# Altium PCB m14sim.PcbDoc
Units mil, origin at the board's own origin, x right, y up, seen from the top; angles counter-clockwise.
Board outline 2000 x 2600 mil, 2 copper layers (Top Layer, Bottom Layer); 13 components, 51 nets, 113 pads, 26 vias.
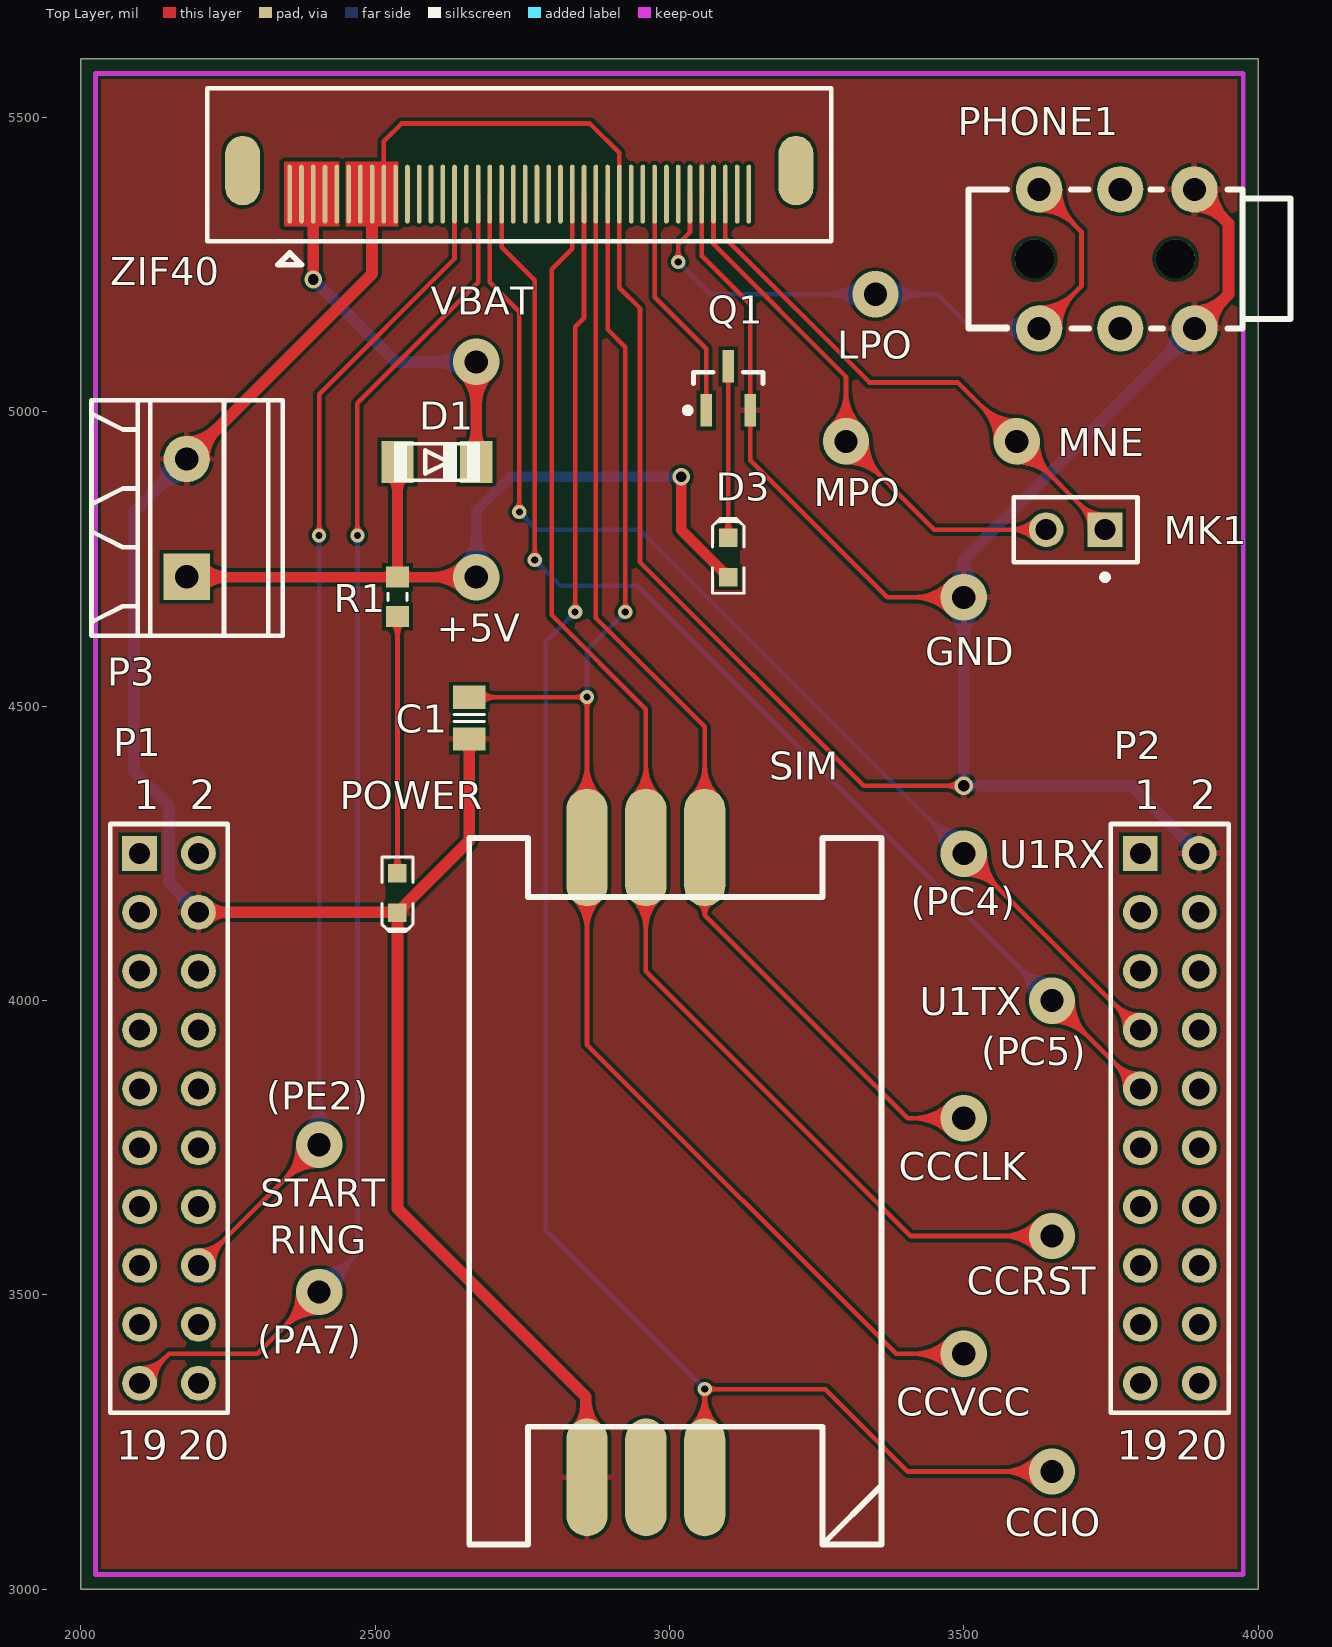
[diagram p0: Top Layer view]
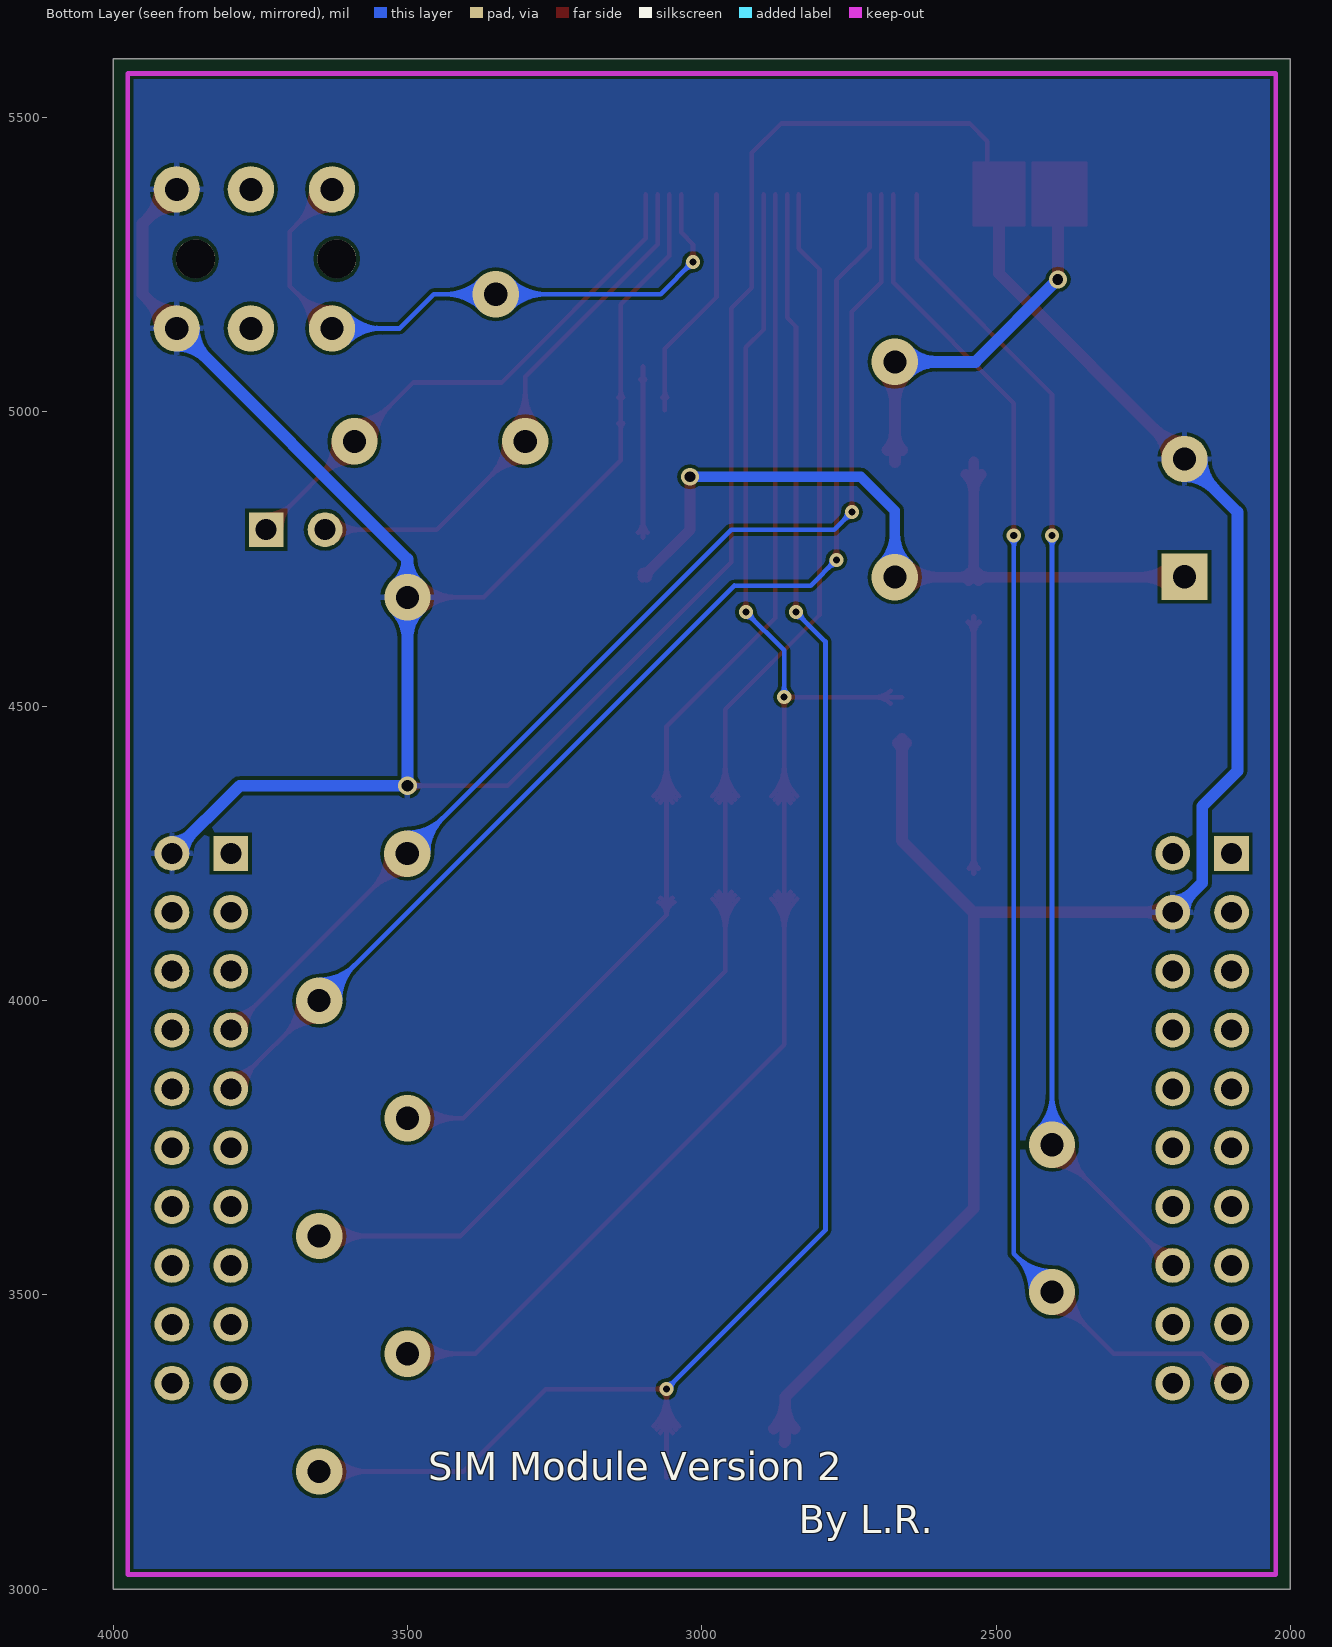
[diagram p1: Bottom Layer view, seen from below]

## Layer stack, top to bottom
Top Layer: signal copper 1.4
Dielectric: dielectric 12.6, FR-4, Dk 4.8
Bottom Layer: signal copper 1.4

## Board outline
2000,3000 4000,3000 4000,5600 2000,5600

## Design rules (kind name [scope] priority, off if disabled: settings)
Clearance [All] p1: gap=6
PolygonConnect [All] p1: connectstyle=Relief reliefconductorwidth=10 reliefentries=4 polygonreliefangle="90 Angle"
RoutingVias VSS [InNet('CCGND')] p1: holewidth=20 width=32 viastyle="Through Hole" minholewidth=20 minwidth=32 maxholewidth=40 maxwidth=80
RoutingVias 5V [(InNet('VBAT') OR InNet('V5'))] p2: holewidth=18 width=30 viastyle="Through Hole" minholewidth=18 minwidth=30 maxholewidth=40 maxwidth=80
RoutingVias [All] p3: holewidth=12 width=24 viastyle="Through Hole" minholewidth=12 minwidth=24 maxholewidth=40 maxwidth=80
SilkscreenOverComponentPads [All] p1: minsilkscreentomaskgap=10
SolderMaskExpansion [All] p1: expansion=4
Width GND [InNet('CCGND')] p1: maxlimit=22 minlimit=7.87 preferedwidth=20
Width VCC [(InNet('VBAT') OR InNet('V5'))] p2: maxlimit=20 minlimit=7.87 preferedwidth=18
Width [All] p3: maxlimit=9 minlimit=7.87 preferedwidth=8
27 further rules are at their usual default settings.

## Components (designator, comment, footprint, x,y, rotation, side; value= is the part's Value field where it differs from the comment)
C1 "Cap Semi" CAP_0805 2660,4480 r90 top
D1 "DIAO" DIAO 2610,4925 r180 top
D3 "LED3" LED_0603_RED 3100,4753 r90 top
MK1 "Mic2" PIN2 3740,4800 r180 top
P1 "Header 10X2" HDR2X10 2100,4250 r270 top
P2 "Header 10X2" HDR2X10 3800,4250 r270 top
P3 "Header 2" MKDSN_2RMI 2180,4720 r90 top
PHONE1 "PHONE_M" PHONE_ST 3760,5260 r0 top
POWER "POWER" LED_0603_RED 2538.07,4183 r270 top
Q1 "S8050" SOT23 3100,5040 r90 top
R1 "Res Semi" RES_0603 2538.07,4686 r90 top
SIM "SIMCARD" SIM6 3060,4260 r270 top
ZIF40 "TC35I" ZIF 2620,4880 r180 top (schematic designator *?)

## Footprints (in the part's own frame and the unit in brackets; to place one, negate y for a bottom-side part, rotate by r counter-clockwise, add the part's x,y. Pads: shape width x height; smd on the part's side, far side on the other; paste and mask are expansions set on the pad)
CAP_0805 [mm] "Chip Capacitor, Body 2.0x1.2mm, 0805, IPC Medium Density"
  rect 1x1.4 smd: 1(-0.9,0) 2(0.9,0)
  Top Layer pour cut-out: -0.4,0.8 0.4,0.8 0.4,-0.8 -0.4,-0.8
  silkscreen extent -0.15,-0.65 0.15,0.65, body extent -1.1,-0.72 1.1,0.73, height 1.34
DIAO [mm]
  rect 1.4x1.8 smd: 1(1.827,0.254) 2(-1.573,0.254)
  silkscreen extent -1.73,-0.61 1.98,1.12
HDR2X10 [mm] "Connector; Header; 10x2 Position"
  rect 1.5x1.5 hole 0.9: 1(0,0)
  round 1.5 hole 0.9: 2(0,2.54) 3(2.54,0) 4(2.54,2.54) 5(5.08,0) 6(5.08,2.54) 7(7.62,0) 8(7.62,2.54) 9(10.16,0) 10(10.16,2.54) 11(12.7,0) 12(12.7,2.54) 13(15.24,0) 14(15.24,2.54) 15(17.78,0) 16(17.78,2.54) 17(20.32,0) 18(20.32,2.54) 19(22.86,0) 20(22.86,2.54)
  silkscreen extent -1.27,-1.27 24.13,3.81
LED_0603_RED [mm]
  rect 0.8x0.8 smd: 1(-0.85,0) 2(0.85,0)
  Top Layer pour cut-out: -0.5,0.5 0.5,0.5 0.5,-0.5 -0.5,-0.5
  silkscreen extent -1.55,-0.68 1.68,0.67, body extent -0.8,-0.4 0.8,0.4, height 0.75
MKDSN_2RMI [mm]
  rect 2x2 hole 1: 1(0,0)
  round 2 hole 1: 2(5.08,0)
  silkscreen extent -2.54,-4.15 7.62,4.11
PHONE_ST [mm]
  round 1.676 hole 1.676: 0(-3.556,0) 0(2.54,0)
  round 2 hole 1: 1(-3.35,-3) 1(-3.35,3) 2(0.15,-3) 2(0.15,3) 3(3.35,-3) 3(3.35,3)
  silkscreen extent -6.39,-3.01 7.49,3
PIN2 [mm] "Photosensitive Diode; 2 Leads"
  rect 1.5x1.5 hole 0.9: 1(0,0)
  round 1.5 hole 0.9: 2(2.54,0)
  silkscreen extent -1.4,-1.4 3.94,2.17
RES_0603 [mm]
  rect 0.9x1 smd: 1(-0.85,0) 2(0.85,0)
  Top Layer pour cut-out: -0.4,0.6 0.4,0.6 0.4,-0.6 -0.4,-0.6
  silkscreen extent -0.15,-0.41 0.15,0.41, body extent -0.87,-0.47 0.88,0.48, height 0.54
SIM6 [mil]
  oval 200x70 smd: 1(0,-200) 2(0,-100) 3(0,0) 4(1070,-200) 5(1070,-100) 6(1070,0)
  silkscreen extent -16,-400 1184,300
SOT23 [mm] "SOT23, 3-Leads, Body 3.0x2.5mm (max), Pitch 0.95mm, IPC Medium Density"
  rect 1.4x0.5 smd: 1(-0.95,0.95) 2(-0.95,-0.95) 3(0.95,0)
  silkscreen extent -1.07,-1.5 0.7,1.87, body extent -1.4,-1.45 1.4,1.45, height 1.29
ZIF [mil]
  oval 7.87x100 smd: 1(265,-490) 2(245,-490) 3(225,-490) 4(205,-490) 5(185,-490) 6(165,-490) 7(145,-490) 8(125,-490) 9(105,-490) 10(85,-490) 11(65,-490) 12(45,-490) 13(25,-490) 14(5,-490) 15(-15,-490) 16(-35,-490) 17(-55,-490) 18(-75,-490) 19(-95,-490) 20(-115,-490) 21(-135,-490) 22(-155,-490) 23(-175,-490) 24(-195,-490) 25(-215,-490) 26(-235,-490) 27(-255,-490) 28(-275,-490) 29(-295,-490) 30(-315,-490) 31(-335,-490) 32(-355,-490) 33(-375,-490) 34(-395,-490) 35(-415,-490) 36(-435,-490) 37(-455,-490) 38(-475,-490) 39(-495,-490) 40(-515,-490)
  oval 59.05x118.11 smd: ""(-595,-530) ""(345,-530)
  silkscreen extent -655,-670 405,-370

## Part data
C1: "Capacitor (Semiconductor SIM Model)"
D3 POWER: library part LED1, "Typical RED GaAs LED"
MK1: "Microphone"
P1 P2: "Header, 10-Pin, Dual row"
P3: "Header, 2-Pin"
Q1: library part BC848W, "NPN General-purpose Transistor"
R1: "Semiconductor Resistor"

## Via types
v1: diameter 78.74, hole 39.37, Top Layer to Bottom Layer, 14 vias
v2: diameter 24, hole 12, Top Layer to Bottom Layer, 9 vias
v3: diameter 30, hole 18, Top Layer to Bottom Layer, 2 vias
v4: diameter 32, hole 20, Top Layer to Bottom Layer, 1 vias

## Nets (pads, with @x,y where several pads share a name; then routed paths per layer and width w, separated by ;. In a path a pad name is that pad's centre, name@x,y a point inside that pad or via, vN(x,y) a via of type N, cw(c..) or ccw(c..) an arc to the next point about the centre after c; other vN are vias at no path point)
3V3: P1.1
CCCLK: SIM.3 ZIF40.27 | length 2555.7
  Top Layer w7.87: ZIF40.27 2875,4650 3060,4465 SIM.3 ; SIM.3@3038.04,4346.96 ccw(c2985.01,4399.99) 3060,4399.99 ccw(c3134.99,4399.99) SIM.3@3081.96,4346.96 ; SIM.3@3043.6,4341.4 ccw(c3004.02,4380.98) 3060,4380.98 ccw(c3115.98,4380.98) SIM.3@3076.4,4341.4 ; SIM.3@3049.17,4335.83 ccw(c3023.03,4361.97) 3060,4361.97 ccw(c3096.97,4361.97) SIM.3@3070.83,4335.83
  Top Layer w8: SIM.3@3046.22,4167.23 cw(c3035.18,4145) 3060,4145 ; SIM.3@3049.77,4174.4 cw(c3041.59,4157.9) 3060,4157.9 cw(c3078.41,4157.9) SIM.3@3070.23,4174.4 ; SIM.3 3060,4145 ; SIM.3@3073.78,4167.23 ccw(c3084.82,4145) 3060,4145 ; v1@3474.99,3774.99 ccw(c3414.61,3714.61) 3414.61,3800 ccw(c3414.61,3885.39) v1@3474.99,3825.01 ; v1@3480.65,3780.65 ccw(c3433.92,3733.92) 3433.92,3800 ccw(c3433.92,3866.08) v1@3480.65,3819.35 ; v1@3486.3,3786.3 ccw(c3453.24,3753.24) 3453.24,3800 ccw(c3453.24,3846.76) v1@3486.3,3813.7 ; v1(3500,3800) 3405,3800 3060,4145
CCGND: C1.1 P1.4 P2.2 P3.2 PHONE1.3 POWER.2 Q1.2 SIM.4 ZIF40.6 ZIF40.7 ZIF40.8 ZIF40.9 ZIF40.10 ZIF40.29 ZIF40.36 | length 9227.5
  Top Layer w7.87: ZIF40.9 2515,5460 2545,5490 2865,5490 2915,5440 ZIF40.29 2915,5211.25 2950,5176.25 2950,4745 3330,4365 v4(3500,4365) ; ZIF40.36 3055,5265 3137.4,5182.6 Q1.2 ; Q1.2@3133.23,5024.49 ccw(c3123.14,5034.57) 3137.4,5034.57 ccw(c3151.66,5034.57) Q1.2@3141.58,5024.49 ; v4@3491.47,4356.47 ccw(c3470.88,4335.88) 3470.88,4365 ccw(c3470.88,4394.12) v4@3491.47,4373.53
  Top Layer w8: Q1.2@3133.27,4980.75 cw(c3123.3,4970.78) 3137.4,4970.78 cw(c3151.51,4970.78) Q1.2@3141.53,4980.75 ; Q1.2 3137.4,4917.6 3370,4685 v1(3500,4685) ; v1@3474.99,4659.99 ccw(c3414.61,4599.61) 3414.61,4685 ccw(c3414.61,4770.39) v1@3474.99,4710.01 ; v1@3480.65,4665.65 ccw(c3433.92,4618.92) 3433.92,4685 ccw(c3433.92,4751.08) v1@3480.65,4704.35 ; v1@3486.3,4671.3 ccw(c3453.24,4638.24) 3453.24,4685 ccw(c3453.24,4731.76) v1@3486.3,4698.7
  Top Layer w20: P3.2 2495,5235 ZIF40.8 ; P3.2@2180,4949.37 ccw(c2180,5020.28) 2230.14,4970.14 ccw(c2280.28,4920) P3.2@2209.37,4920 ; P1.4 2537.6,4150 POWER.2 ; P1.4@2213.81,4136.19 cw(c2247.14,4102.86) 2247.14,4150 cw(c2247.14,4197.14) P1.4@2213.81,4163.81 ; C1.1@2653.15,4437.72 cw(c2636.62,4421.19) 2660,4421.19 cw(c2683.38,4421.19) C1.1@2666.85,4437.72 ; C1.1 2660,4271.47 POWER.2 ; SIM.4@2842.32,3272.68 ccw(c2804.3,3310.7) 2858.07,3310.7 ; 2858.07,3320.01 ccw(c2925.01,3320.01) SIM.4@2877.68,3272.68 ; SIM.4@2860,3250 2858.07,3251.93 2858.07,3326.93 2538.07,3646.93 POWER.2 ; PHONE1.3@3891.89,5141.89 3950,5200 3950,5320 PHONE1.3@3891.89,5378.11 ; PHONE1.3@3891.89,5171.26 ccw(c3891.89,5242.17) 3942.03,5192.03 ccw(c3992.17,5141.89) PHONE1.3@3921.26,5141.89 ; PHONE1.3@3891.89,5348.74 cw(c3891.89,5277.83) 3942.03,5327.97 cw(c3992.17,5378.11) PHONE1.3@3921.26,5378.11
  Bottom Layer w20: P3.2@2150.63,4920 cw(c2079.72,4920) 2129.86,4869.86 cw(c2180,4819.72) P3.2@2180,4890.63 ; P3.2 2090,4830 2090,4390 2150,4330 2150,4200 P1.4 ; P1.4@2180.47,4150 ccw(c2133.33,4150) 2166.66,4183.34 ccw(c2200,4216.67) P1.4@2200,4169.53 ; v1@3479.23,4664.23 cw(c3429.09,4614.09) 3500,4614.09 cw(c3570.91,4614.09) v1@3520.77,4664.23 ; v1@3480.59,4707.04 ccw(c3442.77,4750) 3500,4750 ; v1@3519.41,4707.04 cw(c3557.23,4750) 3500,4750 ; PHONE1.3@3862.52,5141.89 cw(c3791.61,5141.89) 3841.75,5091.75 cw(c3891.89,5041.61) PHONE1.3@3891.89,5112.52 ; P2.2@3880.47,4250 ccw(c3833.33,4250) 3866.66,4283.34 ccw(c3900,4316.67) P2.2@3900,4269.53 ; PHONE1.3@3891.89,5141.89 3500,4750 ; P2.2 3785,4365 v4(3500,4365) v1(3500,4685) 3500,4750
CCIO: SIM.6 ZIF40.26 | length 3691.7
  Top Layer w7.87: v2@2834.3,4665.7 ccw(c2820.53,4679.47) 2840,4679.47 ccw(c2859.47,4679.47) v2@2845.7,4665.7 ; v2(2840,4660) 2840,5145 2855,5160 ZIF40.26
  Top Layer w8: SIM.6@3038.08,3276.92 ccw(c2985.16,3329.84) 3060,3329.84 ccw(c3134.84,3329.84) SIM.6@3081.92,3276.92 ; SIM.6@3043.74,3271.26 ccw(c3004.47,3310.53) 3060,3310.53 ccw(c3115.53,3310.53) SIM.6@3076.26,3271.26 ; SIM.6@3049.39,3265.61 ccw(c3023.79,3291.21) 3060,3291.21 ccw(c3096.21,3291.21) SIM.6@3070.61,3265.61 ; v2@3054.34,3334.34 cw(c3040.69,3320.69) 3060,3320.69 cw(c3079.31,3320.69) 3065.66,3334.34 cw(c3079.31,3320.69) 3079.31,3340 cw(c3079.31,3359.31) v2@3065.66,3345.66 ; SIM.6 v2(3060,3340) 3265,3340 3405,3200 v1(3650,3200) ; v1@3624.99,3174.99 ccw(c3564.61,3114.61) 3564.61,3200 ccw(c3564.61,3285.39) v1@3624.99,3225.01 ; v1@3630.65,3180.65 ccw(c3583.92,3133.92) 3583.92,3200 ccw(c3583.92,3266.08) v1@3630.65,3219.35 ; v1@3636.3,3186.3 ccw(c3603.24,3153.24) 3603.24,3200 ccw(c3603.24,3246.76) v1@3636.3,3213.7
  Bottom Layer w8: v2@2832,4660 cw(c2812.69,4660) 2826.34,4646.34 cw(c2840,4632.69) v2@2840,4652 ; v2(2840,4660) 2790,4610 2790,3610 v2(3060,3340) ; v2@3052,3340 ccw(c3032.69,3340) 3046.34,3353.66 ccw(c3060,3367.31) v2@3060,3348
CCRST: SIM.2 ZIF40.25 | length 3124
  Top Layer w7.87: ZIF40.25 2835,5277.5 2800,5242.5 2800,4655 2960,4495 SIM.2 SIM.2@2960,4250 ; SIM.2@2938.04,4346.96 ccw(c2885.01,4399.99) 2960,4399.99 ccw(c3034.99,4399.99) SIM.2@2981.96,4346.96 ; SIM.2@2943.6,4341.4 ccw(c2904.02,4380.98) 2960,4380.98 ccw(c3015.98,4380.98) SIM.2@2976.4,4341.4 ; SIM.2@2949.17,4335.83 ccw(c2923.03,4361.97) 2960,4361.97 ccw(c2996.97,4361.97) SIM.2@2970.83,4335.83
  Top Layer w8: SIM.2@2938.08,4173.08 cw(c2885.16,4120.16) 2960,4120.16 cw(c3034.84,4120.16) SIM.2@2981.92,4173.08 ; SIM.2@2943.74,4178.74 cw(c2904.47,4139.47) 2960,4139.47 cw(c3015.53,4139.47) SIM.2@2976.26,4178.74 ; SIM.2@2949.39,4184.39 cw(c2923.79,4158.79) 2960,4158.79 cw(c2996.21,4158.79) SIM.2@2970.61,4184.39 ; SIM.2 2960,4050 3410,3600 v1(3650,3600) ; v1@3624.99,3574.99 ccw(c3564.61,3514.61) 3564.61,3600 ccw(c3564.61,3685.39) v1@3624.99,3625.01 ; v1@3630.65,3580.65 ccw(c3583.92,3533.92) 3583.92,3600 ccw(c3583.92,3666.08) v1@3630.65,3619.35 ; v1@3636.3,3586.3 ccw(c3603.24,3553.24) 3603.24,3600 ccw(c3603.24,3646.76) v1@3636.3,3613.7
CCVCC: C1.2 SIM.1 ZIF40.28 | length 3597.9
  Top Layer w7.87: ZIF40.28 2895,5140 2925,5110 v2(2925,4660) ; v2@2919.3,4665.7 ccw(c2905.53,4679.47) 2925,4679.47 ccw(c2944.47,4679.47) v2@2930.7,4665.7
  Top Layer w8: C1.2 v2(2860,4515.43) SIM.1 ; C1.2@2678.96,4504.34 cw(c2705.74,4477.57) 2705.74,4515.43 cw(c2705.74,4553.3) C1.2@2678.96,4526.52 ; SIM.1@2838.08,4173.08 cw(c2785.16,4120.16) 2860,4120.16 cw(c2934.84,4120.16) SIM.1@2881.92,4173.08 ; SIM.1@2838.08,4346.92 ccw(c2785.16,4399.84) 2860,4399.84 ccw(c2934.84,4399.84) SIM.1@2881.92,4346.92 ; SIM.1@2843.74,4178.74 cw(c2804.47,4139.47) 2860,4139.47 cw(c2915.53,4139.47) SIM.1@2876.26,4178.74 ; SIM.1@2843.74,4341.26 ccw(c2804.47,4380.53) 2860,4380.53 ccw(c2915.53,4380.53) SIM.1@2876.26,4341.26 ; SIM.1@2849.39,4184.39 cw(c2823.79,4158.79) 2860,4158.79 cw(c2896.21,4158.79) SIM.1@2870.61,4184.39 ; SIM.1@2849.39,4335.61 ccw(c2823.79,4361.21) 2860,4361.21 ccw(c2896.21,4361.21) SIM.1@2870.61,4335.61 ; v2@2854.34,4521.09 cw(c2840.69,4534.75) 2840.69,4515.43 cw(c2840.69,4496.12) 2854.34,4509.78 cw(c2840.69,4496.12) 2860,4496.12 cw(c2879.31,4496.12) v2@2865.66,4509.78 ; SIM.1@2860,4250 SIM.1 ; v1@3474.99,3374.99 ccw(c3414.61,3314.61) 3414.61,3400 ccw(c3414.61,3485.39) v1@3474.99,3425.01 ; v1@3480.65,3380.65 ccw(c3433.92,3333.92) 3433.92,3400 ccw(c3433.92,3466.08) v1@3480.65,3419.35 ; v1@3486.3,3386.3 ccw(c3453.24,3353.24) 3453.24,3400 ccw(c3453.24,3446.76) v1@3486.3,3413.7 ; v1(3500,3400) 3385,3400 2860,3925 SIM.1
  Bottom Layer w8: v2@2854.34,4521.09 ccw(c2840.69,4534.75) 2860,4534.75 ccw(c2879.31,4534.75) v2@2865.66,4521.09 ; v2(2860,4515.43) 2860,4595 v2(2925,4660) ; v2@2917,4660 cw(c2897.69,4660) 2911.34,4646.34 cw(c2925,4632.69) v2@2925,4652
LPO: PHONE1.1 ZIF40.35 | length 2696.8
  Top Layer w7.87: v2@3009.3,5260.7 ccw(c2995.53,5274.47) 3015,5274.47 ccw(c3034.47,5274.47) v2@3020.7,5260.7 ; v2(3015,5255) 3015,5285 3035,5305 ZIF40.35
  Top Layer w8: PHONE1.1@3628.11,5141.89 3700,5213.78 3700,5306.22 PHONE1.1@3628.11,5378.11 ; PHONE1.1@3628.11,5161.26 ccw(c3628.11,5208.02) 3661.18,5174.96 ccw(c3694.24,5141.89) PHONE1.1@3647.48,5141.89 ; PHONE1.1@3628.11,5169.26 ccw(c3628.11,5235.34) 3674.83,5188.61 ccw(c3721.56,5141.89) PHONE1.1@3655.48,5141.89 ; PHONE1.1@3628.11,5177.26 ccw(c3628.11,5262.65) 3688.49,5202.27 ccw(c3748.87,5141.89) PHONE1.1@3663.48,5141.89 ; PHONE1.1@3628.11,5342.74 cw(c3628.11,5257.35) 3688.49,5317.73 cw(c3748.87,5378.11) PHONE1.1@3663.48,5378.11 ; PHONE1.1@3628.11,5350.74 cw(c3628.11,5284.66) 3674.83,5331.39 cw(c3721.56,5378.11) PHONE1.1@3655.48,5378.11 ; PHONE1.1@3628.11,5358.74 cw(c3628.11,5311.98) 3661.18,5345.04 cw(c3694.24,5378.11) PHONE1.1@3647.48,5378.11
  Bottom Layer w8: v2@3015,5247 cw(c3015,5227.69) 3028.66,5241.34 cw(c3042.31,5255) v2@3023,5255 ; v2(3015,5255) 3070,5200 v1(3350,5200) 3455,5200 3513.11,5141.89 PHONE1.1@3628.11,5141.89 ; v1@3324.99,5174.99 ccw(c3264.61,5114.61) 3264.61,5200 ccw(c3264.61,5285.39) v1@3324.99,5225.01 ; v1@3330.65,5180.65 ccw(c3283.92,5133.92) 3283.92,5200 ccw(c3283.92,5266.08) v1@3330.65,5219.35 ; v1@3336.3,5186.3 ccw(c3303.24,5153.24) 3303.24,5200 ccw(c3303.24,5246.76) v1@3336.3,5213.7 ; v1@3363.7,5186.3 cw(c3396.76,5153.24) 3396.76,5200 cw(c3396.76,5246.76) v1@3363.7,5213.7 ; v1@3369.35,5180.65 cw(c3416.08,5133.92) 3416.08,5200 cw(c3416.08,5266.08) v1@3369.35,5219.35 ; v1@3375.01,5174.99 cw(c3435.39,5114.61) 3435.39,5200 cw(c3435.39,5285.39) v1@3375.01,5225.01 ; PHONE1.1@3603.1,5116.88 ccw(c3542.72,5056.5) 3542.72,5141.89 ccw(c3542.72,5227.28) PHONE1.1@3603.1,5166.9 ; PHONE1.1@3608.76,5122.54 ccw(c3562.03,5075.81) 3562.03,5141.89 ccw(c3562.03,5207.97) PHONE1.1@3608.76,5161.24 ; PHONE1.1@3614.41,5128.19 ccw(c3581.35,5095.13) 3581.35,5141.89 ccw(c3581.35,5188.65) PHONE1.1@3614.41,5155.59
MNE: MK1.1 ZIF40.38 | length 1716.3
  Top Layer w7.87: ZIF40.38 3095,5295 3340,5050 3490,5050 v1(3590,4950) MK1.1 ; v1@3554.57,4950 ccw(c3469.02,4950) 3529.51,5010.49 ccw(c3590,5070.98) v1@3590,4985.43 ; v1@3562.44,4950 ccw(c3495.91,4950) 3542.95,4997.05 ccw(c3590,5044.09) v1@3590,4977.56 ; v1@3570.31,4950 ccw(c3522.79,4950) 3556.4,4983.6 ccw(c3590,5017.21) v1@3590,4969.69 ; v1@3590,4914.57 cw(c3590,4829.02) 3650.49,4889.51 cw(c3710.98,4950) v1@3625.43,4950 ; v1@3590,4922.44 cw(c3590,4855.91) 3637.05,4902.95 cw(c3684.09,4950) v1@3617.56,4950 ; v1@3590,4930.31 cw(c3590,4882.79) 3623.6,4916.4 cw(c3657.21,4950) v1@3609.69,4950 ; MK1.1@3714.41,4800 ccw(c3652.63,4800) 3696.31,4843.69 ccw(c3740,4887.37) MK1.1@3740,4825.59 ; MK1.1@3722.28,4800 ccw(c3679.51,4800) 3709.76,4830.24 ccw(c3740,4860.49) MK1.1@3740,4817.72
MPO: MK1.2 ZIF40.37 | length 1706.6
  Top Layer w7.87: ZIF40.37 3075,5285 3300,5060 v1(3300,4950) 3450,4800 MK1.2 ; v1@3274.95,4975.05 ccw(c3214.46,5035.54) 3300,5035.54 ccw(c3385.54,5035.54) v1@3325.05,4975.05 ; v1@3280.51,4969.49 ccw(c3233.47,5016.53) 3300,5016.53 ccw(c3366.53,5016.53) v1@3319.49,4969.49 ; v1@3286.08,4963.92 ccw(c3252.48,4997.52) 3300,4997.52 ccw(c3347.52,4997.52) v1@3313.92,4963.92 ; v1@3300,4914.57 cw(c3300,4829.02) 3360.49,4889.51 cw(c3420.98,4950) v1@3335.43,4950 ; v1@3300,4922.44 cw(c3300,4855.91) 3347.05,4902.95 cw(c3394.09,4950) v1@3327.56,4950 ; v1@3300,4930.31 cw(c3300,4882.79) 3333.6,4916.4 cw(c3367.21,4950) v1@3319.69,4950 ; MK1.2@3621.9,4781.9 ccw(c3578.22,4738.22) 3578.22,4800 ccw(c3578.22,4861.78) MK1.2@3621.9,4818.1 ; MK1.2@3627.47,4787.47 ccw(c3597.23,4757.23) 3597.23,4800 ccw(c3597.23,4842.77) MK1.2@3627.47,4812.53
NetD3_2: D3.2 Q1.3 | length 357.6
  Top Layer w8: D3.2@3091.69,4794.77 ccw(c3071.64,4814.82) 3100,4814.82 ; Q1.3@3095.87,5055.55 cw(c3085.89,5045.58) 3100,5045.58 cw(c3114.11,5045.58) Q1.3@3104.13,5055.55 ; D3.2 Q1.3 ; 3100,4814.83 ccw(c3128.37,4814.83) D3.2@3108.31,4794.77
NetPOWER_1: POWER.1 R1.1 | length 528.8
  Top Layer w9: R1.1@2528.72,4643.19 cw(c2506.16,4620.63) 2538.07,4620.63 cw(c2569.98,4620.63) R1.1@2547.41,4643.19 ; POWER.1@2530.12,4224.42 ccw(c2510.91,4243.62) 2538.07,4243.62 ccw(c2565.22,4243.62) POWER.1@2546.02,4224.42 ; POWER.1 R1.1
NetQ1_1: Q1.1 ZIF40.32 | length 426.1
  Top Layer w7.87: ZIF40.32 2975,5195 3062.6,5107.4 Q1.1 ; Q1.1@3058.42,5024.49 ccw(c3048.34,5034.57) 3062.6,5034.57 ccw(c3076.86,5034.57) Q1.1@3066.77,5024.49
PA2: P2.20
PA3: P2.18
PA4: P2.16
PA5: P1.15
PA6: P1.17
PA7: P1.19 ZIF40.17 | length 3193
  Top Layer w7.87: v2@2464.3,4795.7 ccw(c2450.53,4809.47) 2470,4809.47 ccw(c2489.47,4809.47) v2@2475.7,4795.7 ; v2(2470,4790) 2470,5015 2675,5220 ZIF40.17
  Top Layer w8: P1.19 2150,3400 2300,3400 v1(2405,3505) ; P1.19@2100,3367.53 ccw(c2100,3409.84) 2129.92,3379.92 ccw(c2159.84,3350) P1.19@2117.53,3350 ; P1.19@2100,3375.53 ccw(c2100,3437.16) 2143.58,3393.58 ccw(c2187.16,3350) P1.19@2125.53,3350 ; v1@2369.63,3505 cw(c2284.24,3505) 2344.62,3444.62 cw(c2405,3384.24) v1@2405,3469.63 ; v1@2377.63,3505 cw(c2311.55,3505) 2358.28,3458.28 cw(c2405,3411.55) v1@2405,3477.63 ; v1@2385.63,3505 cw(c2338.87,3505) 2371.93,3471.93 cw(c2405,3438.87) v1@2405,3485.63
  Bottom Layer w7.87: 2470,3570 2470,3575
  Bottom Layer w8: v1(2405,3505) 2470,3570 ; v1@2405,3524.37 ccw(c2405,3571.13) 2438.07,3538.07 ccw(c2471.13,3505) v1@2424.37,3505 ; v1@2405,3532.37 ccw(c2405,3598.45) 2451.72,3551.72 ccw(c2498.45,3505) v1@2432.37,3505 ; v1@2405,3540.37 ccw(c2405,3625.76) 2465.38,3565.38 ccw(c2525.76,3505) v1@2440.37,3505 ; v2@2464.34,4784.34 cw(c2450.69,4770.69) 2470,4770.69 cw(c2489.31,4770.69) v2@2475.66,4784.34 ; 2470,3575 v2(2470,4790)
PB0: P1.5
PB1: P1.7
PB2: P2.4
PB3: P2.5
PB4: P1.13
PB5: P1.3
PB6: P2.14
PB7: P2.12
PC4: P2.7 ZIF40.18 | length 2827.2
  Top Layer w7.87: ZIF40.18 2695,5220 2745,5170 v2(2745,4830) ; v2@2739.3,4835.7 ccw(c2725.53,4849.47) 2745,4849.47 ccw(c2764.47,4849.47) v2@2750.7,4835.7
  Top Layer w8: v1@3500.3,4214.33 cw(c3500.3,4128.94) 3560.68,4189.32 cw(c3621.06,4249.7) v1@3535.67,4249.7 ; v1@3500.3,4222.33 cw(c3500.3,4156.26) 3547.02,4202.98 cw(c3593.74,4249.7) v1@3527.67,4249.7 ; v1@3500.3,4230.33 cw(c3500.3,4183.57) 3533.36,4216.64 cw(c3566.43,4249.7) v1@3519.67,4249.7 ; v1(3500.3,4249.7) P2.7 ; P2.7@3774.47,3950 ccw(c3712.84,3950) 3756.42,3993.58 ccw(c3800,4037.16) P2.7@3800,3975.53 ; P2.7@3782.47,3950 ccw(c3740.16,3950) 3770.08,3979.92 ccw(c3800,4009.84) P2.7@3800,3967.53
  Bottom Layer w8: v2@2745,4822 cw(c2745,4802.69) 2758.66,4816.34 cw(c2772.31,4830) v2@2753,4830 ; v2(2745,4830) 2775,4800 2950,4800 v1(3500.3,4249.7) ; v1@3464.93,4249.7 ccw(c3379.54,4249.7) 3439.92,4310.08 ccw(c3500.3,4370.46) v1@3500.3,4285.07 ; v1@3472.93,4249.7 ccw(c3406.85,4249.7) 3453.57,4296.43 ccw(c3500.3,4343.15) v1@3500.3,4277.07 ; v1@3480.93,4249.7 ccw(c3434.16,4249.7) 3467.23,4282.77 ccw(c3500.3,4315.84) v1@3500.3,4269.07
PC5: P2.9 ZIF40.19 | length 2892.8
  Top Layer w7.87: ZIF40.19 2715,5280 2771.25,5223.75 v2(2771.25,4748.75) ; v2@2765.55,4754.45 ccw(c2751.78,4768.22) 2771.25,4768.22 ccw(c2790.72,4768.22) v2@2776.95,4754.45
  Top Layer w8: v1@3650,3964.63 cw(c3650,3879.24) 3710.38,3939.62 cw(c3770.76,4000) v1@3685.37,4000 ; v1@3650,3972.63 cw(c3650,3906.55) 3696.72,3953.28 cw(c3743.45,4000) v1@3677.37,4000 ; v1@3650,3980.63 cw(c3650,3933.87) 3683.07,3966.93 cw(c3716.13,4000) v1@3669.37,4000 ; v1(3650,4000) P2.9 ; P2.9@3774.47,3850 ccw(c3712.84,3850) 3756.42,3893.58 ccw(c3800,3937.16) P2.9@3800,3875.53 ; P2.9@3782.47,3850 ccw(c3740.16,3850) 3770.08,3879.92 ccw(c3800,3909.84) P2.9@3800,3867.53
  Bottom Layer w7.87: v2@2771.25,4740.69 cw(c2771.25,4721.22) 2785.01,4734.99 cw(c2798.78,4748.75) v2@2779.31,4748.75 ; v2(2771.25,4748.75) 2815,4705 2945,4705
  Bottom Layer w8: 2945,4705 v1(3650,4000) ; v1@3614.63,4000 ccw(c3529.24,4000) 3589.62,4060.38 ccw(c3650,4120.76) v1@3650,4035.37 ; v1@3622.63,4000 ccw(c3556.55,4000) 3603.28,4046.72 ccw(c3650,4093.45) v1@3650,4027.37 ; v1@3630.63,4000 ccw(c3583.87,4000) 3616.93,4033.07 ccw(c3650,4066.13) v1@3650,4019.37
PC6: P2.11
PC7: P2.13
PD0: P1.6
PD1: P1.8
PD2: P1.10
PD3: P1.12
PD6: P2.15
PD7: P2.17
PE0: P2.6
PE1: P1.14
PE2: P1.16 ZIF40.15 | length 2847.1
  Top Layer w7.87: v2@2399.3,4795.7 ccw(c2385.53,4809.47) 2405,4809.47 ccw(c2424.47,4809.47) v2@2410.7,4795.7 ; v2(2405,4790) 2405,5030 2635,5260 ZIF40.15
  Top Layer w8: P1.16 v1(2405,3755) ; P1.16@2200,3567.53 ccw(c2200,3609.84) 2229.92,3579.92 ccw(c2259.84,3550) P1.16@2217.53,3550 ; P1.16@2200,3575.53 ccw(c2200,3637.16) 2243.58,3593.58 ccw(c2287.16,3550) P1.16@2225.53,3550 ; v1@2369.63,3755 cw(c2284.24,3755) 2344.62,3694.62 cw(c2405,3634.24) v1@2405,3719.63 ; v1@2377.63,3755 cw(c2311.55,3755) 2358.28,3708.28 cw(c2405,3661.55) v1@2405,3727.63 ; v1@2385.63,3755 cw(c2338.87,3755) 2371.93,3721.93 cw(c2405,3688.87) v1@2405,3735.63
  Bottom Layer w8: v1@2379.99,3780.01 ccw(c2319.61,3840.39) 2405,3840.39 ccw(c2490.39,3840.39) v1@2430.01,3780.01 ; v1@2385.65,3774.35 ccw(c2338.92,3821.08) 2405,3821.08 ccw(c2471.08,3821.08) v1@2424.35,3774.35 ; v1@2391.3,3768.7 ccw(c2358.24,3801.76) 2405,3801.76 ccw(c2451.76,3801.76) v1@2418.7,3768.7 ; v2@2399.34,4784.34 cw(c2385.69,4770.69) 2405,4770.69 cw(c2424.31,4770.69) v2@2410.66,4784.34 ; v1(2405,3755) v2(2405,4790)
PE3: P1.18
PE4: P1.9
PE5: P1.11
PF0: P2.8
PF1: P1.20
PF2: P2.1
PF3: P2.3
PF4: P2.19
RST: P2.10
V5: D1.1 D3.1 P3.1 R1.2 | length 1915.8
  Top Layer w18: P3.1@2180.54,4719.46 R1.2 ; P3.1@2201.47,4698.53 cw(c2252.03,4647.97) 2252.03,4719.46 ; P3.1@2201.47,4741.47 ccw(c2254.61,4794.61) 2254.61,4719.46 ; D1.1@2524.95,4894 cw(c2493.26,4862.32) 2538.07,4862.32 cw(c2582.88,4862.32) D1.1@2551.19,4894 ; R1.2@2529.94,4713.3 ccw(c2515.06,4698.42) 2515.06,4719.46 ccw(c2515.06,4740.51) R1.2@2529.94,4725.63 ; R1.2@2531.91,4725.63 ccw(c2517.02,4740.51) 2538.07,4740.51 ccw(c2559.11,4740.51) R1.2@2544.23,4725.63 ; D1.1 R1.2 ; R1.2@2546.2,4713.3 cw(c2561.08,4698.42) 2561.08,4719.46 cw(c2561.08,4740.51) R1.2@2546.2,4725.63 ; v1@2650.46,4697.99 ccw(c2598.61,4646.14) 2598.61,4719.46 ccw(c2598.61,4792.78) v1@2650.46,4740.94 ; v1(2671.93,4719.46) R1.2 ; v3(3020,4890) 3020,4799.54 D3.1 ; D3.1@3093.25,4719.54 ccw(c3076.96,4719.54) 3088.48,4731.06 ccw(c3100,4742.58) D3.1@3100,4726.28
  Bottom Layer w18: v1@2650.46,4740.94 ccw(c2598.61,4792.78) 2671.93,4792.78 ccw(c2745.25,4792.78) v1@2693.4,4740.94 ; v1(2671.93,4719.46) 2671.93,4831.93 2730,4890 v3(3020,4890)
VBAT: D1.2 ZIF40.1 ZIF40.2 ZIF40.3 ZIF40.4 ZIF40.5 | length 939.3
  Top Layer w20: v3(2395,5225) ZIF40.3 ; v1@2651.16,5064.23 cw(c2601.02,5014.09) 2671.93,5014.09 cw(c2742.84,5014.09) v1@2692.7,5064.23 ; D1.2@2659.51,4935.29 ccw(c2629.54,4965.27) 2671.93,4965.27 ccw(c2714.32,4965.27) D1.2@2684.35,4935.29 ; D1.2 v1(2671.93,5085)
  Bottom Layer w20: v3(2395,5225) 2535,5085 v1(2671.93,5085) ; v1@2651.16,5064.23 ccw(c2601.02,5014.09) 2601.02,5085 ccw(c2601.02,5155.91) v1@2651.16,5105.77
VBUS: P1.2
pads on no net: PHONE1.0 PHONE1.2 SIM.5 ZIF40. ZIF40.11 ZIF40.12 ZIF40.13 ZIF40.14 ZIF40.16 ZIF40.20 ZIF40.21 ZIF40.22 ZIF40.23 ZIF40.24 ZIF40.30 ZIF40.31 ZIF40.33 ZIF40.34 ZIF40.39 ZIF40.40

## Polygon pours and split planes (outlines as drawn)
CCGND on Top Layer "Bottom Layer-No Net" (solid, remove dead copper, pour order 1000): 2000,5600 2000,3000 4000,3000 4000,5600
CCGND on Bottom Layer "Bottom Layer-No Net" (solid, remove dead copper, pour order 1001): 2000,5600 2000,3000 4000,3000 4000,5600

## Keep-outs
Keep-Out Layer:
  lines w8: 2025,3025 3975,3025 3975,5575 2025,5575 2025,3025

## Other copper
Top Layer:
  rectangle net CCGND: 2450,5315 2540,5425
  rectangle net VBAT: 2345,5315 2440,5425

## Silkscreen, mask and mechanical layers (free items; w line width, h text height)
Top Overlay:
  text "VBAT" at 2595,5165 h48
  text "LPO" at 3285,5090 h48
  text "MNE" at 3660,4925 h48
  text "MPO" at 3245,4840 h48
  text "+5V" at 2605,4610 h48
  text "GND" at 3435,4570 h48
  text "U1RX" at 3560,4225 h48
  text "(PC4)" at 3410,4145 h48
  text "U1TX" at 3425,3975 h48
  text "(PC5)" at 3530,3890 h48
  text "(PE2)" at 2315,3815 h48
  text "CCCLK" at 3390,3695 h48
  text "START" at 2305,3650 h48
  text "RING" at 2320,3570 h48
  text "CCRST" at 3505,3500 h48
  text "(PA7)" at 2300,3400 h48
  text "CCVCC" at 3385,3295 h48
  text "CCIO" at 3570,3090 h48
Bottom Overlay:
  text "SIM Module Version 2" at 3465,3185 h48
  text "By L.R." at 2835,3095 h48

## Text inside footprints (layer, text, board x,y; h text height)
P1: Top Overlay "20" at 2165,3220 h50; Top Overlay "19" at 2060,3220 h50; Top Overlay "1" at 2090,4325 h50; Top Overlay "2" at 2185,4325 h50
P2: Top Overlay "20" at 3860,3220 h50; Top Overlay "19" at 3760,3220 h50; Top Overlay "1" at 3790,4325 h50; Top Overlay "2" at 3885,4325 h50